# Altium PCB led-pb-wing.PcbDoc
Units mil, origin at the board's own origin, x right, y up, seen from the top; angles counter-clockwise.
Board outline 1968.5 x 800 mil, 2 copper layers (Top Layer, Bottom Layer); 17 components, 14 nets, 60 pads, 16 vias.
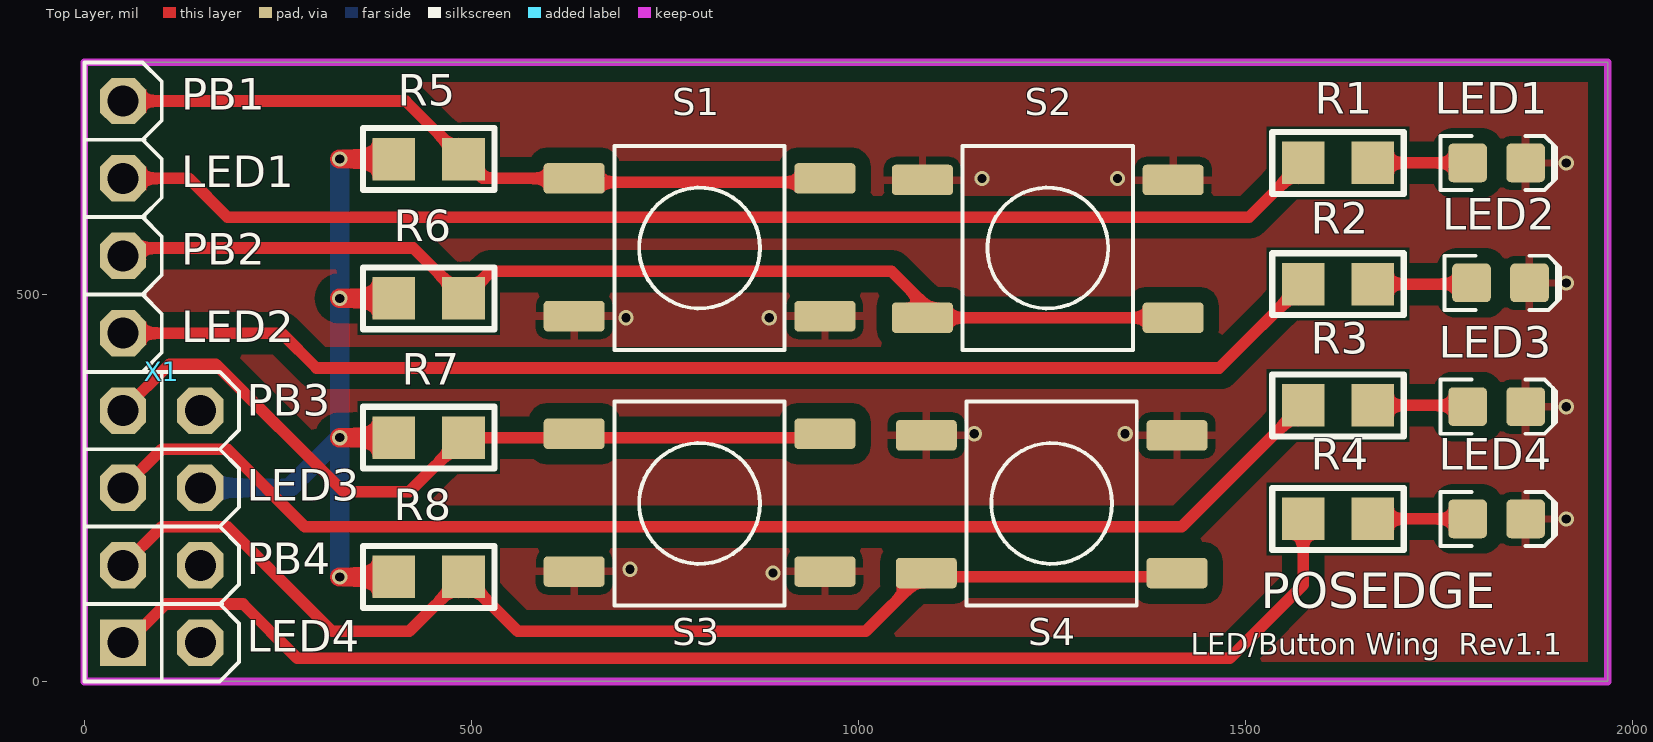
[diagram p0: Top Layer view]
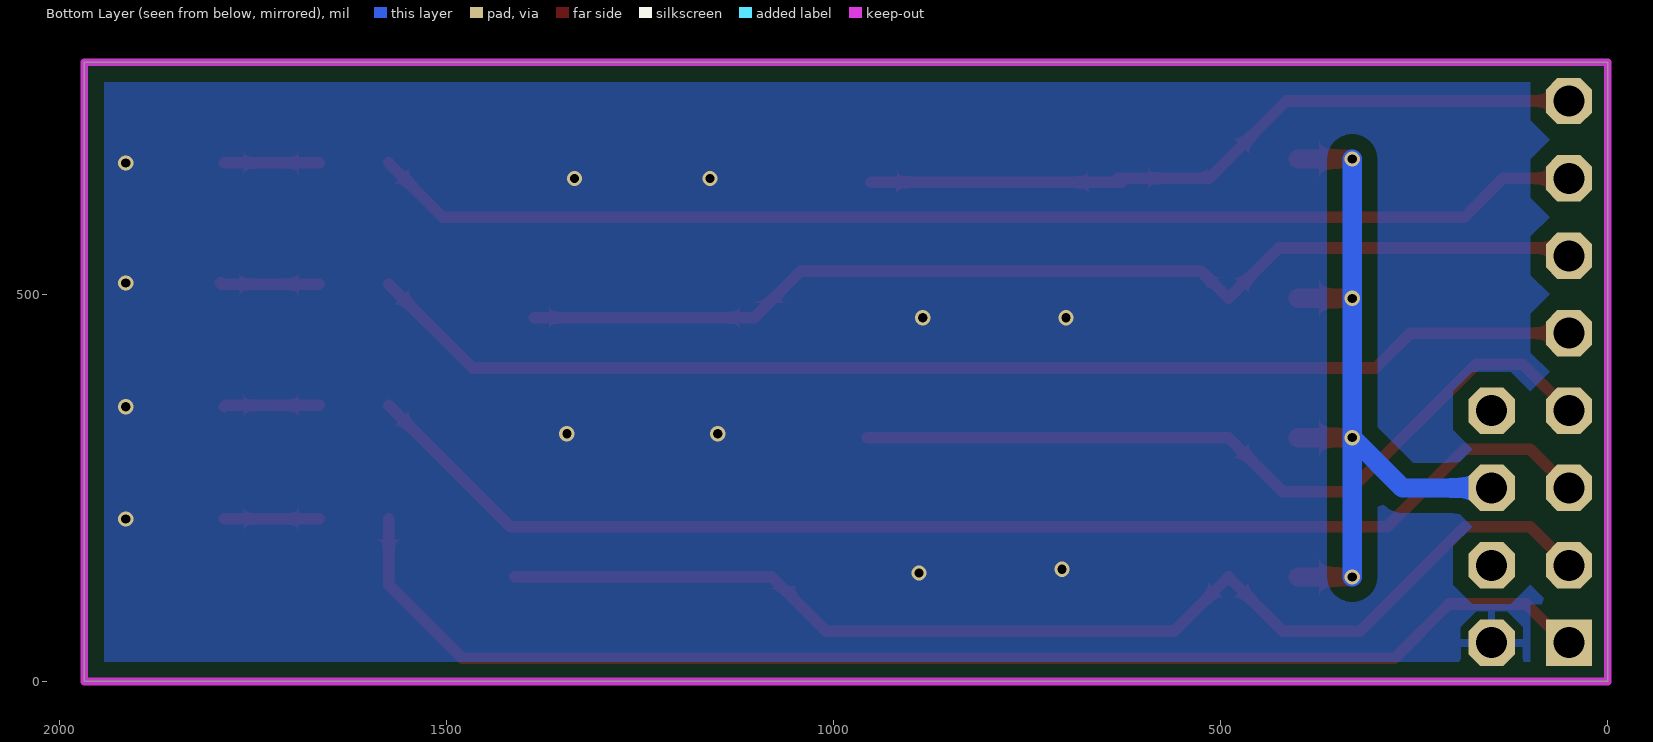
[diagram p1: Bottom Layer view, seen from below]

## Layer stack, top to bottom
Top Solder: solder mask 0.4, Solder Resist, Dk 3.5
Top Layer: signal copper 1.4
Dielectric 1: dielectric 12.6, FR-4, Dk 4.8
Bottom Layer: signal copper 1.4
Bottom Solder: solder mask 0.4, Solder Resist, Dk 3.5

## Board outline
0,0 1968.5,0 1968.5,800 0,800

## Design rules (kind name [scope] priority, off if disabled: settings)
Clearance Clearance_Poly_to_con [InPoly  And ( Not InNet('GND')) vs InComponent('WING')] p1: gap=35
Clearance Clearance_poly_to_all [InNet('GND') and InPoly] p2: gap=20
Clearance Clearance_all_to_all [All] p3: gap=10
DiffPairsRouting [All] p1: maxlimit=10 minlimit=10 mostfreqgap=10 toplayer_minwidth=10 toplayer_maxwidth=15 toplayer_prefwidth=15 bottomlayer_minwidth=10 bottomlayer_maxwidth=15 bottomlayer_prefwidth=15 maxuncoupledlength=500
HoleSize [All] p1: absolutevalues=TRUE maxlimit=150 minlimit=1 maxpercent=80.000 minpercent=20.000
MinimumSolderMaskSliver [All] p1: minsoldermaskwidth=1
PolygonConnect PolygonConnect_1 [InNet('GND')  And InComponent('WING')] p1 off: connectstyle=Direct reliefconductorwidth=10 reliefentries=4 polygonreliefangle="90 Angle" airgapwidth=10
PolygonConnect PolygonConnect_via [IsVia] p2: connectstyle=Direct reliefconductorwidth=10 reliefentries=4 polygonreliefangle="90 Angle" airgapwidth=10
PolygonConnect PolygonConnect_GND [InNet('GND')] p3: connectstyle=Relief reliefconductorwidth=10 reliefentries=4 polygonreliefangle="90 Angle" airgapwidth=10
PolygonConnect [All] p4: connectstyle=Direct reliefconductorwidth=10 reliefentries=4 polygonreliefangle="90 Angle" airgapwidth=10
RoutingCorners RoutingCorners_1 [OnLayer('Top Overlay')] p1: cornerstyle=90-Degree minsetback=100 maxsetback=100
RoutingCorners [All] p2: cornerstyle=45-Degree minsetback=100 maxsetback=100
RoutingVias [All] p1: holewidth=19.68 width=31.5 viastyle="Through Hole" minholewidth=19.68 minwidth=31.5 maxholewidth=47.24 maxwidth=59.06
SilkToBoardRegionClearance [All] p1 off:
SilkToSilkClearance [All] p1: silktosilkclearance=3
SilkToSolderMaskClearance [IsPad] p1: minsilkscreentomaskgap=3 clearancetoexposedcopper=TRUE
SolderMaskExpansion [All] p1: expansion=4
UnRoutedNet UnRoutedNet_1 [All] p1:
UnRoutedNet [All] p2:
Width [All] p1: maxlimit=75 minlimit=10 preferedwidth=10 minimp=50.000000 maximp=50.000000 favimp=50.000000
22 further rules are at their usual default settings.

## Components (designator, comment, footprint, x,y, rotation, side; value= is the part's Value field where it differs from the comment)
LED1 "" LED_0805 1825,670 r0 top
LED2 "" LED_0805 1830,515 r0 top
LED3 "" LED_0805 1825,355 r0 top
LED4 "" LED_0805 1825,210 r0 top
R1 "1.2K" R0805_M 1620,670 r180 top
R2 "1.2K" R0805_M 1620,513.33 r180 top
R3 "1.2K" R0805_M 1620,356.67 r180 top
R4 "1.2K" R0805_M 1620,210 r180 top
R5 "4.7K" R0805_M 445,675 r180 top
R6 "4.7K" R0805_M 445,495 r180 top
R7 "4.7K" R0805_M 445,315 r180 top
R8 "4.7K" R0805_M 445,135 r180 top
S1 "USER PB" TS645S 795,560 r180 top
S2 "USER PB" TS645S 1245,560 r0 top
S3 "USER PB" TS645S 795,230 r180 top
S4 "USER PB" TS645S 1250,230 r0 top
X1 "WING8WING8_NOHOLES" WINGSIDE_8BIT_NOHOLES 0,800 r270 top

## Footprints (in the part's own frame and the unit in brackets; to place one, negate y for a bottom-side part, rotate by r counter-clockwise, add the part's x,y. Pads: shape width x height; smd on the part's side, far side on the other; paste and mask are expansions set on the pad)
LED_0805 [mil]
  round 20 on Mech15: 0(0,0)
  rrect25% 50x50 smd: 1(37.5,0) 2(-37.5,0)
  Top Layer pour cut-out: -15,30 15,30 15,-30 -15,-30
  silkscreen extent -72,-35 77,35, body extent -39,-25 39,25, height 31
R0805_M [mil]
  rect 55x55 smd: 1(-45,0) 2(45,0)
  silkscreen extent -85,-40 85,40, body extent -39,-24 39,24, height 20
TS645S [mil] "SMT Tactile Switch (6mm x 6mm) - Height 5 mm"
  round 20 on Mech15: 0(0,0)
  rrect25% 78.74x39.37 smd: 1(-162,88) 1(162,88) 2(-162,-90) 2(162,-90)
  silkscreen extent -110,-132 110,132, body extent -177,-118 177,118, height 197
WINGSIDE_8BIT_NOHOLES [mil]
  oct 60x60 hole 40: 2V5@2(650,150) 3V3@2(550,150) 5V@2(450,150) A1(650,50) A2(550,50) A3(450,50) A4(350,50) A5(250,50) A6(150,50) A7(50,50) GND@2(750,150)
  rect 60x60 hole 40: A0(750,50)
  silkscreen extent 0,0 800,200, body extent 0,0 800,200, height 335

## Part data
LED1 LED2 LED3 LED4: library part LED_0805, "LED, 0805 SMD"
R1 R2 R3 R4 R5 R6 R7 R8: library part R0805, "Chip Resistor size 0805"
S1 S2 S3 S4: library part SW_SMD_4Pin, "SMT Tactile Switch (6mm x 6mm)"

## Via types
v1: diameter 19.68, hole 11.81, Top Layer to Bottom Layer, tented both sides, 16 vias

## Nets (pads, with @x,y where several pads share a name; then routed paths per layer and width w, separated by ;. In a path a pad name is that pad's centre, name@x,y a point inside that pad or via, vN(x,y) a via of type N, cw(c..) or ccw(c..) an arc to the next point about the centre after c; other vN are vias at no path point)
GND: LED1.1 LED2.1 LED3.1 LED4.1 S1.1 S2.1 S3.1 S4.1 X1.GND@2
  other v1: 890,140 705,145 1915,210 1150,320 1345,320 1915,355 700,470 885,470 1915,515 1160,650 1335,650 1915,670
LED1: R1.2 X1.A6 | length 1574.7
  Top Layer w15: X1.A6 135,650 185,600 1505,600 R1.2
LED2: R2.2 X1.A4 | length 1588.5
  Top Layer w15: X1.A4 255,450 300,405 1466.67,405 R2.2
LED3: R3.2 X1.A2 | length 1652
  Top Layer w15: X1.A2 100,300 185,300 285,200 1418.33,200 R3.2
LED4: R4.2 X1.A0 | length 1699.1
  Top Layer w15: X1.A0 55,50 105,100 205,100 275,30 1480,30 1575,125 R4.2
NetLED1_2: LED1.2 R1.1 | length 122.5
  Top Layer w15: R1.1 LED1.2
NetLED2_2: LED2.2 R2.1 | length 128.2
  Top Layer w15: R2.1 1790.83,513.33 LED2.2
NetLED3_2: LED3.2 R3.1 | length 123.2
  Top Layer w15: R3.1 1785.83,356.67 LED3.2
NetLED4_2: LED4.2 R4.1 | length 122.5
  Top Layer w15: R4.1 LED4.2
SW1: R5.1 S1.2 X1.A7 | length 948.4
  Top Layer w15: X1.A7 415,750 R5.1 515,650 S1.2@633,650 ; S1.2@628,645 S1.2@952,645
SW2: R6.1 S2.2 X1.A5 | length 1407.4
  Top Layer w15: X1.A5 60,560 425,560 R6.1 525,530 1043,530 1103,470 S2.2@1387,470
SW3: R7.1 S3.2 X1.A3 | length 1029.2
  Top Layer w15: X1.A3 110,410 170,410 335,245 420,245 R7.1 S3.2@957,315
SW4: R8.1 S4.2 X1.A1 | length 1525.6
  Top Layer w15: X1.A1 100,200 185,200 320,65 420,65 R8.1 560,65 1010,65 1080,135 S4.2@1412,135
VCC3V3: R5.2 R6.2 R7.2 R8.2 X1.3V3@2 | length 1026.9
  Top Layer w25: v1(330,135) R8.2 ; v1(330,315) R7.2 ; v1(330,495) R6.2 ; v1(330,675) R5.2
  Bottom Layer w25: 150,250 265,250 v1(330,315) ; v1(330,135) v1(330,315) ; v1(330,675) v1(330,495) v1(330,315)
pads on no net: LED1.0 LED2.0 LED3.0 LED4.0 S1.0 S2.0 S3.0 S4.0 X1.2V5@2 X1.5V@2

## Polygon pours and split planes (outlines as drawn)
GND on Bottom Layer "Top Paste-No Net" (solid, pour order 4): 0,800 0,0 1968.5,0 1968.5,800
GND on Top Layer "Top Paste-No Net" (solid, remove dead copper, pour order 3): 0,800 0,0 1968.5,0 1968.5,800

## Keep-outs
Keep-Out Layer:
  the board outline again, w10

## Silkscreen, mask and mechanical layers (free items; w line width, h text height)
Top Overlay:
  text "PB1" at 125,725 h70
  text "LED1" at 125,625 h70
  text "PB2" at 125,525 h70
  text "LED2" at 125,425 h70
  text "PB3" at 210,330 h70
  text "LED3" at 210,220 h70
  text "PB4" at 210,125 h70
  text "POSEDGE" at 1520,80 h78
  text "LED4" at 210,25 h70
  text "LED/Button Wing  Rev1.1" at 1430,25 h48